# EAGLE board 7cell_1b (EAGLE 4.16)
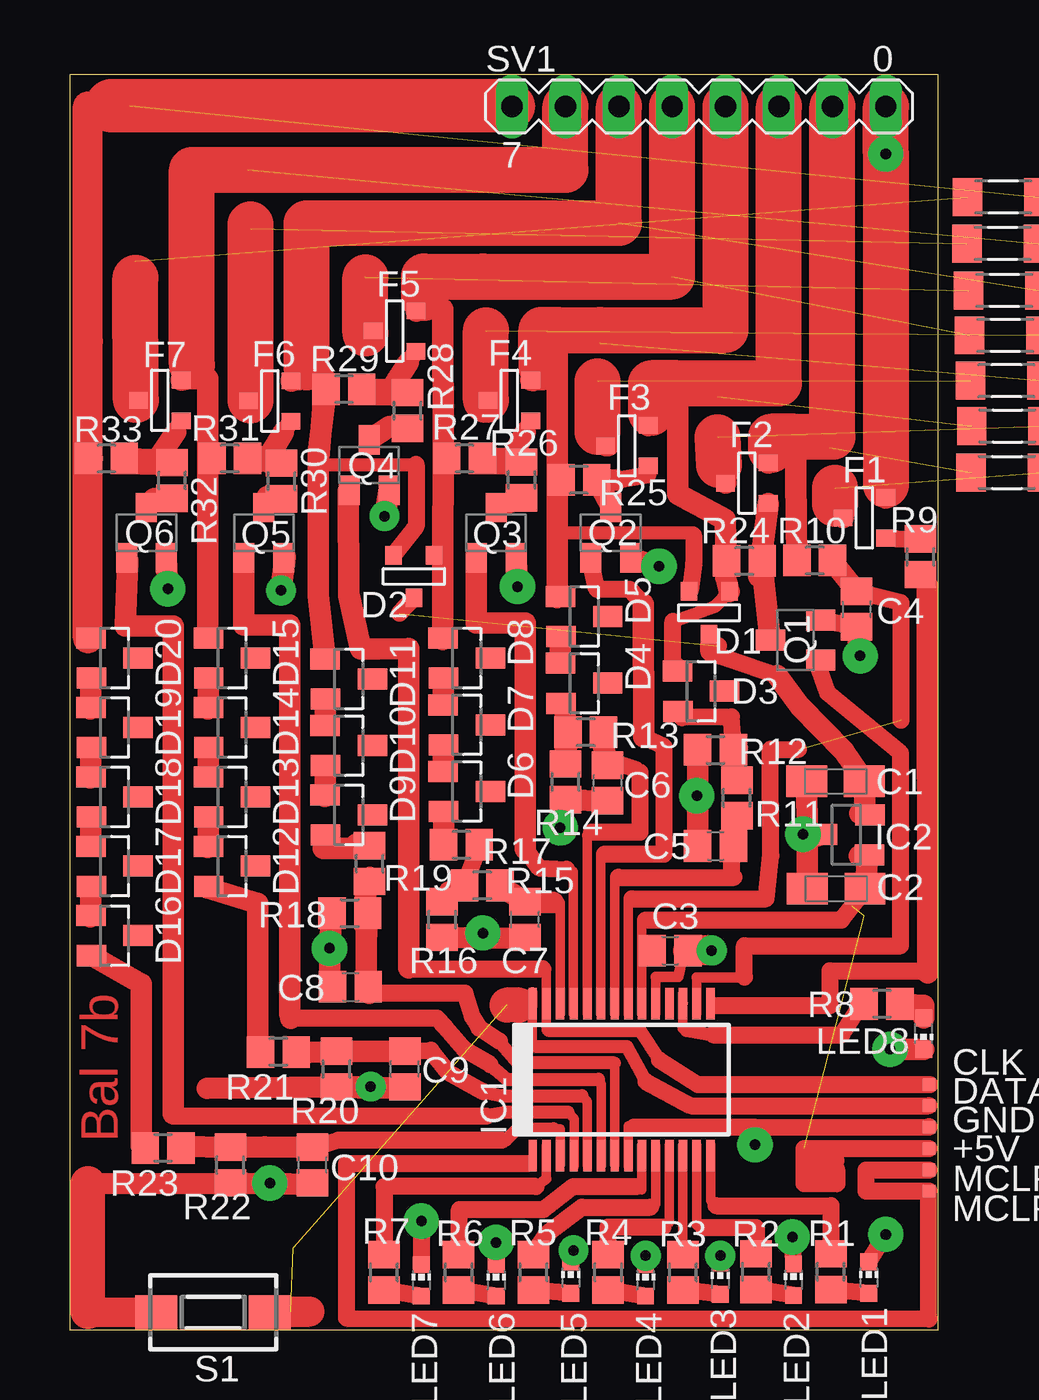
[diagram p0: board, top side]
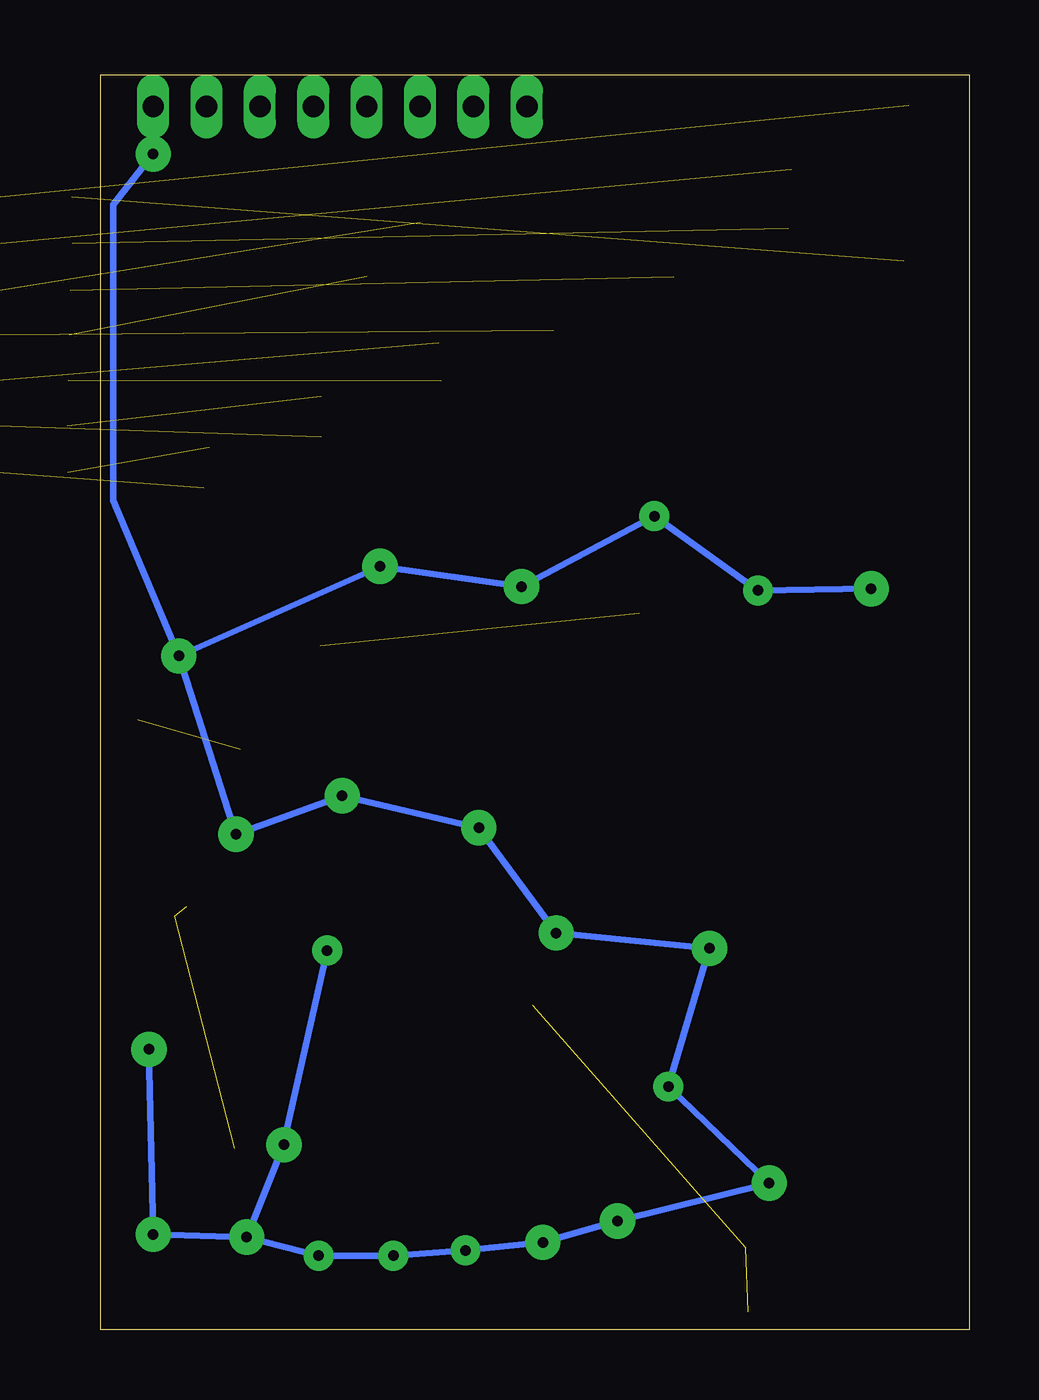
[diagram p1: board, bottom side, seen from below]

Size 41.33 x 59.76 mm. Coordinates in mm from the lower left corner, seen from the top.
Outline: 0,0 41.33,0 41.33,59.76 0,59.76 0,0
Copper layers (1*16): Top 0.035mm / dielectric 1.5mm / Bottom 0.035mm
Design rules "default": minimum track width 10mil, minimum drill 24mil, track to track 8mil, track to pad 8mil, pad to pad 8mil, via to via 8mil, smd to smd 8mil, copper to edge 40mil, drill to drill 8mil, minimum pad ring 10mil, minimum via ring 8mil, stop-mask expansion 4mil, vias tented up to drill 0mil, thermal gap 10mil

## Footprints (pad centres in the part's own frame; a part is rotated, then mirrored left to right if it is on the bottom)
TP06SQ = smd 0.6 x 0.6: TP 0,0
A/3216-18R = smd 1.95 x 1.5: + 1.375,0; - -1.375,0
C0805 = smd 1.3 x 1.5: 1 -0.85,0; 2 0.85,0
SOT-23 = smd 0.787 x 0.889: 1 0.025,-1.016; 2 -0.94,1.016; 3 0.991,1.016
SOT23 = smd 1 x 1.4: 1 0.955,-1.1; 2 -0.003,1.123; 3 -0.953,-1.123
SSOP28 = smd 0.4 x 1.5: 1 -4.225,-3.625; 2 -3.575,-3.625; 3 -2.925,-3.625; 4 -2.275,-3.625; 5 -1.625,-3.625; 6 -0.975,-3.625; 7 -0.325,-3.625; 8 0.325,-3.625; 9 0.975,-3.625; 10 1.625,-3.625; 11 2.275,-3.625; 12 2.925,-3.625; 13 3.575,-3.625; 14 4.225,-3.625; 15 4.225,3.625; 16 3.575,3.625; 17 2.925,3.625; 18 2.275,3.625; 19 1.625,3.625; 20 0.975,3.625; 21 0.325,3.625; 22 -0.325,3.625; 23 -0.975,3.625; 24 -1.625,3.625; 25 -2.275,3.625; 26 -2.925,3.625; 27 -3.575,3.625; 28 -4.225,3.625
SOT23' = smd 1 x 1.4: 1 0.003,1.123; 2 -0.955,-1.1; 3 0.953,-1.123
CHIP-LED0603 = smd 0.8 x 0.8: A 0,-0.75; C 0,0.75
SC59-BEC = smd 1 x 1.4: B -0.95,-1.2; C 0,1.2; E 0.95,-1.2
R0805 = smd 1.3 x 1.5: 1 -0.85,0; 2 0.85,0
M3516 = smd 1.4 x 1.8: 1 -1.7,0; 2 1.7,0
DTSM-3 = smd 2 x 1.6: 1 -2.7,0; 2 2.7,0
MA08-1 = drill 1.016 long: 1 -8.89,0; 2 -6.35,0; 3 -3.81,0; 4 -1.27,0; 5 1.27,0; 6 3.81,0; 7 6.35,0; 8 8.89,0

## Placement (x,y rotation side)
+5V  TPSTP06SQ  [TP06SQ]  40.88,8.63 0 top
C1  1u tant  [A/3216-18R]  36.44,26.11 0 top
C2  1u tant  [A/3216-18R]  36.46,21 0 top
C3  0.1  [C0805]  28.56,18.05 0 top
C4  0.1  [C0805]  37.43,34.31 270 top
C5  0.1  [C0805]  30.72,23.03 0 top
C6  0.1  [C0805]  25.59,26.03 90 top
C7  0.1  [C0805]  21.65,19.53 90 top
C8  0.1  [C0805]  13.35,16.33 0 top
C9  0.1  [C0805]  15.94,12.42 90 top
C10  0.1  [C0805]  11.54,7.84 90 top
CLK  TPSTP06SQ  [TP06SQ]  40.88,11.68 0 top
D1  1PS70SB15  [SOT-23]  30.39,34.13 0 top
D2  1PS70SB15  [SOT-23]  16.34,35.86 0 top
D3  5v ref diode  [SOT23]  30.04,30.4 270 top
D4  [SOT23]  24.47,30.78 270 top
D5  2x4.1v ref diodes  [SOT23]  24.47,33.95 270 top
D6  2.5, 4.1 & 5v ref diodes  [SOT23]  18.88,25.62 270 top
D7  [SOT23]  18.88,28.8 270 top
D8  [SOT23]  18.88,31.97 270 top
D9  3x5v ref diodes  [SOT23]  13.27,24.51 270 top
D10  [SOT23]  13.27,27.81 270 top
D11  [SOT23]  13.27,30.98 270 top
D12  1x3.3 & 3x5v ref diodes  [SOT23]  7.71,22.07 270 top
D13  [SOT23]  7.71,25.37 270 top
D14  [SOT23]  7.71,28.67 270 top
D15  [SOT23]  7.71,31.97 270 top
D16  1x2.5, 1x3.3, 3x5v ref diodes  [SOT23]  2.12,18.77 270 top
D17  [SOT23]  2.12,22.07 270 top
D18  [SOT23]  2.12,25.37 270 top
D19  [SOT23]  2.12,28.67 270 top
D20  [SOT23]  2.12,31.97 270 top
DATA  TPSTP06SQ  [TP06SQ]  40.88,10.66 0 top
F1  PMV31XN  [SOT-23]  37.81,38.68 270 top
F2  PMV31XN  [SOT-23]  32.22,40.33 270 top
F3  PMV31XN  [SOT-23]  26.5,42.11 270 top
F4  PMV31XN  [SOT-23]  20.92,44.27 270 top
F5  PMV31XN  [SOT-23]  15.46,47.57 270 top
F6  PMV31XN  [SOT-23]  9.51,44.24 270 top
F7  PMV31XN  [SOT-23]  4.28,44.27 270 top
GND  TPSTP06SQ  [TP06SQ]  40.88,9.65 0 top
IC1  PIC16F886  [SSOP28]  26.25,11.91 0 top
IC2  XC6202  [SOT23']  36.94,23.57 90 top
LED1  [CHIP-LED0603]  38.01,2.48 0 top
LED2  [CHIP-LED0603]  34.43,2.38 0 top
LED3  [CHIP-LED0603]  30.95,2.43 0 top
LED4  [CHIP-LED0603]  27.39,2.36 0 top
LED5  [CHIP-LED0603]  23.84,2.48 0 top
LED6  [CHIP-LED0603]  20.28,2.36 0 top
LED7  [CHIP-LED0603]  16.73,2.36 0 top
LED8  [CHIP-LED0603]  40.63,14.09 180 top
MCLR  TPSTP06SQ  [TP06SQ]  40.88,6.6 0 top
MCLR*  TPSTP06SQ  [TP06SQ]  40.88,7.62 0 top
Q1  MMUN2215  [SC59-BEC]  34.53,32.84 90 top
Q2  MMUN2215  [SC59-BEC]  25.74,37.94 0 top
Q3  MMUN2215  [SC59-BEC]  20.28,37.94 0 top
Q4  MMUN2215  [SC59-BEC]  14.24,41.17 0 top
Q5  MMUN2215  [SC59-BEC]  9.23,37.94 0 top
Q6  MMUN2215  [SC59-BEC]  3.64,37.94 0 top
R1  1k  [R0805]  36.21,2.76 90 top
R2  1k  [R0805]  32.65,2.76 90 top
R3  1k  [R0805]  29.17,2.74 90 top
R4  1k  [R0805]  25.62,2.74 90 top
R5  1k  [R0805]  22.06,2.74 90 top
R6  1k  [R0805]  18.5,2.74 90 top
R7  1k  [R0805]  14.95,2.74 90 top
R8  1k  [R0805]  38.65,15.51 180 top
R9  10k  [R0805]  40.48,36.8 90 top
R10  4k7  [R0805]  35.45,36.62 180 top
R11  1k  [R0805]  31.74,25.32 90 top
R12  4k7  [R0805]  30.72,27.6 0 top
R13  1k  [R0805]  24.55,28.44 180 top
R14  4k7  [R0805]  23.58,26.08 90 top
R15  1k  [R0805]  19.62,21.15 180 top
R16  4k7  [R0805]  17.72,19.53 90 top
R17  470  [R0805]  18.63,23.08 180 top
R18  3k9  [R0805]  13.32,19.83 0 top
R19  1k  [R0805]  14.26,22.19 90 top
R20  3k3  [R0805]  12.69,12.42 90 top
R21  1k5  [R0805]  9.92,13.23 180 top
R22  2k7  [R0805]  7.63,7.84 90 top
R23  2k2  [R0805]  4.43,8.66 180 top
R24  10k  [R0805]  32.09,36.6 180 top
R25  10k  [R0805]  24.22,40.46 180 top
R26  5k6  [R0805]  21.5,40.46 90 top
R27  4k7  [R0805]  18.78,41.47 180 top
R28  5k6  [R0805]  16.07,43.76 90 top
R29  4k7  [R0805]  13.04,44.78 180 top
R30  5k6  [R0805]  10.07,40.41 90 top
R31  4k7  [R0805]  7.61,41.47 180 top
R32  5k6  [R0805]  4.86,40.43 90 top
R33  4k7  [R0805]  1.74,41.47 180 top
R34  8.2R 3W  [M3516]  44.59,40.81 180 top
R35  8.2R 3W  [M3516]  44.62,43.02 180 top
R36  8.2R 3W  [M3516]  44.56,45.18 0 top
R37  8.2R 3W  [M3516]  44.51,47.34 180 top
R38  8.2R 3W  [M3516]  44.46,49.47 0 top
R39  8.2R 3W  [M3516]  44.39,51.71 0 top
R40  8.2R 3W  [M3516]  44.41,53.92 0 top
S1  [DTSM-3]  6.82,0.83 180 top
SV1  [MA08-1]  29.93,58.24 0 top

## Library data of the parts
+5V CLK DATA GND MCLR MCLR* = testpad
C1-C10 R1-R40 = rcl
D1 D2 F1-F7 = zetex
D3-D20 = diode
IC1 = microchip
IC2 = v-reg
LED1-LED8 = led
Q1-Q6 = transistor
S1 = switch-tact
SV1 = con-lstb

## Nets
C6: C1.- C2.- C3.2 C4.2 C5.1 C6.1 C7.1 C8.1 C9.1 C10.1 F1.2 GND.TP IC1.8 IC1.19 IC2.1 LED1.C LED2.C LED3.C LED4.C LED5.C LED6.C LED7.C LED8.C Q1.E Q2.E Q3.E Q4.E Q5.E Q6.E R12.1 R14.1 R16.1 R18.1 R20.1 R22.1 S1.2 SV1.8
D7B: D17.3 D18.1
N$1: LED4.A R4.1
N$2: F1.1 R34.1
N$3: D3.1 R11.2 R12.2
N$4: LED8.A R8.1
N$5: D2.3 D8.3 F5.2 R27.2 R37.2 SV1.4
N$6: F2.3 Q1.C R24.1
N$7: F3.3 Q2.C R25.1
N$8: LED1.A R1.1
N$9: F4.1 R37.1
N$10: LED2.A R2.1
N$11: IC1.17 R8.2
N$12: F3.1 R36.1
N$13: C4.1 IC1.21 R10.1
N$14: D4.1 R13.2 R14.2
N$15: IC1.12 R3.2
N$17: C1.+ D1.1 D2.1 IC2.3
N$18: D1.3 D3.3 F3.2 R24.2 R35.2 SV1.6
N$19: LED5.A R5.1
N$20: D7.3 D8.1
N$21: IC1.1 MCLR*.TP MCLR.TP
N$22: F2.1 R35.1
N$23: F2.2 R10.2 R34.2 SV1.7
N$24: LED3.A R3.1
N$25: D1.2 D5.3 F4.2 R25.2 R36.2 SV1.5
N$26: IC1.23 Q2.B
N$27: IC1.13 R2.2
N$28: IC1.14 R1.2
N$29: F1.3 R9.2
N$30: IC1.2 R7.2
N$31: IC1.15 R9.1
N$32: F4.3 R26.2 R27.1
N$33: D4.3 D5.1
N$34: D6.3 D7.1
N$35: C5.2 IC1.22 R11.1
N$36: Q3.C R26.1
N$37: Q4.C R28.1
N$38: F5.3 R28.2 R29.1
N$39: F5.1 R38.1
N$40: Q5.C R30.1
N$41: F6.3 R30.2 R31.1
N$42: F6.1 R39.1
N$43: F7.1 R40.1
N$44: Q6.C R32.1
N$45: F7.3 R32.2 R33.1
N$46: D2.2 D11.3 F6.2 R29.2 R38.2 SV1.3
N$47: D15.3 F7.2 R31.2 R39.2 SV1.2
N$48: D20.3 R33.2 R40.2 SV1.1
N$49: IC1.9 R6.2
N$50: CLK.TP IC1.27 Q4.B
N$51: IC1.6 Q5.B
N$52: IC1.4 Q6.B
N$53: C6.2 IC1.24 R13.1
N$54: D6.1 R17.2
N$55: C8.2 IC1.7 R18.2 R19.1
N$56: D10.3 D11.1
N$57: D9.3 D10.1
N$58: C9.2 IC1.5 R20.2 R21.1
N$59: C10.2 IC1.3 R22.2 R23.1
N$60: D14.3 D15.1
N$61: D13.3 D14.1
N$62: D12.3 D13.1
N$63: D12.1 R21.2
N$64: D9.1 R19.2
N$65: D19.3 D20.1
N$66: D18.3 D19.1
N$67: C7.2 IC1.26 R15.1
N$68: D16.3 D17.1
N$69: D16.1 R23.2
N$70: R15.2 R16.2 R17.1
N$71: LED6.A R6.1
N$72: LED7.A R7.1
N$76: IC1.16 Q1.B
N$80: IC1.10 R5.2
N$81: IC1.11 R4.2
N$82: DATA.TP IC1.28 S1.1
N$83: +5V.TP C2.+ C3.1 IC1.20 IC2.2
N$84: IC1.25 Q3.B

## Tracks (layer width: path | path; a pad name or v marks a point on that pad's centre or on a via)
C6  (via drill 0.5 pad 1.42, 0.5 pad 1.68)
  Top 0.305: C5.1 29.83,23.13 v29.83,25.42 | R16.1 17.74,18.64 v19.65,18.89
  Top 0.406: 26.58,7.79 IC1.8
  Top 0.457: 26.58,7.79 26.58,9.7 26.84,9.65 | IC1.19 27.88,15.03 27.88,16.81
  Top 0.508: 27.88,16.81 28.94,16.81 29.17,17.77 C3.2
  Top 0.61: 32.5,9.65 32.5,9.72
  Top 0.813: 26.84,9.65 32.5,9.65 32.55,9.65 | Q1.E 36.69,33.6 37.4,33.55 C4.2 | v16.73,5.18 LED7.C | v20.28,4.16 LED6.C | v23.96,3.78 LED5.C | v27.39,3.53 LED4.C | v30.95,3.53 LED3.C | v34.38,4.41 LED2.C | v38.82,4.54 LED1.C | 32.55,9.65 32.58,9.65 v32.6,8.81 32.55,9.65 | GND.TP 40.88,9.67 32.55,9.65
  Top 1.016: 11.57,6.93 C10.1 | 11.57,6.93 9.26,6.95 R22.1 9.23,6.95 v9.51,6.98 | C9.1 15.94,11.53 13.78,11.53 R20.1 6.54,11.5 v14.31,11.58 | C8.1 12.36,16.25 12.36,18.41 R18.1 v12.36,18.16 | 25.67,25.22 C6.1 R14.1 v23.33,23.9 | C5.1 R12.1 29.96,27.6 | IC2.1 35.34,23.57 35.09,23.57 C1.- | 35.09,23.44 35.34,23.44 IC2.1 | 35.09,23.44 C2.- | 35.09,23.44 35.19,23.44 | C7.1 21.55,18.64 R16.1 | 38.82,39.59 F1.2 38.82,40.23 | v4.66,35.28 Q6.E | Q5.E 10.25,36.8 v10.05,35.2 | v14.97,38.73 Q4.E | v21.3,35.38 Q3.E | v28.03,36.34 Q2.E | C4.2 37.43,33.5 v37.6,32.08 | IC2.1 35.9,23.59 v34.89,23.59 | 0.85,6.95 v9.51,6.98 | v9.51,6.98 11.57,6.93 | v39.03,13.36 LED8.C
  Top 1.422: 0.85,0.86 S1.2 | v30.54,18.05 C3.2
  Top 1.676: 0.85,0.86 0.85,6.95
  Top 2.184: 38.82,40.23 v38.82,55.98 SV1.8
  Bottom 0.305: v4.66,35.28 v10.05,35.2 v14.97,38.73 v21.3,35.38 v28.03,36.34 v37.6,32.08 | v37.6,32.08 40.73,39.47 40.73,53.56 v38.82,55.98 | v37.6,32.08 v34.89,23.59 v29.83,25.42 v23.33,23.9 v19.65,18.89 v12.36,18.16 v14.31,11.58 v9.51,6.98 v16.73,5.18 v20.28,4.16 v23.96,3.78 v27.39,3.53 v30.95,3.53 v34.38,4.41 | v34.38,4.41 v38.82,4.54 38.82,4.57 v39.03,13.36 | v34.38,4.41 v32.6,8.81 32.63,8.81 v30.54,18.05
D7B
  Top 1.016: D17.3 0.98,23.08 D18.1
N$1
  Top 0.813: R4.1 25.64,1.87 LED4.A
N$2  (1 unrouted)
  Top 1.016: F1.1 36.66,38.91 36.41,39.31
  Top 2.184: 36.41,39.31 36.41,40.08
N$3
  Top 0.813: D3.1 29.12,29.14 31.48,29.18 31.59,27.73
  Top 1.016: R12.2 31.61,27.6 31.76,27.71 | 31.61,26.21 31.74,26.21 | R11.2 31.61,26.21 | R12.2 31.57,26.21 31.61,26.21 | R12.2 31.59,27.73
N$4
  Top 1.016: LED8.A 40.63,15.44 R8.1
N$5  (1 unrouted)
  Top 0.305: 16.85,49.12 16.98,49.75 19.65,50.13 19.52,49.5
  Top 0.61: 17.77,36.88 17.75,36.88 D2.3
  Top 1.016: 17.77,41.6 R27.2 | 17.77,41.6 17.74,48.59 16.98,48.97 F5.2 | 17.74,32.93 17.74,32.86 | D8.3 17.74,32.93 | 17.74,32.93 17.75,36.88 17.77,41.6 | F5.2 16.47,48.48 | F5.2 16.85,49.12
  Top 2.184: SV1.4 28.66,50.13 19.65,50.13 16.85,50.13 16.85,49.12
N$6
  Top 1.016: F2.3 32.78,35.86 R24.1 33.01,35.63 Q1.C
N$7
  Top 0.813: F3.3 27.52,40.71 26,40.46
  Top 1.016: 26,40.46 R25.1 25.74,39.21 Q2.C
N$8
  Top 0.813: R1.1 36.23,1.9 LED1.A
N$9  (1 unrouted)
  Top 1.016: F4.1 20.28,44.24 19.8,44.27
  Top 2.184: 19.8,44.27 19.8,47.57
N$10
  Top 0.813: R2.1 32.65,1.93 LED2.A
N$11
  Top 0.457: IC1.17 | IC1.17 29.17,16.02 | IC1.17 29.17,14.35
  Top 0.508: 29.17,14.35 29.35,14.24
  Top 0.61: 29.35,14.24 30.59,14.04
  Top 0.813: 30.59,14.04 36.74,14.04 37.71,15.57 R8.2
N$12  (1 unrouted)
  Top 1.016: F3.1 25.62,42.08 25.11,42.74
  Top 2.184: 25.11,42.74 25.11,45.16
N$13  (1 unrouted)
  Top 0.457: 26.58,15.01 IC1.21 26.58,20.39 26.76,20.52
  Top 0.813: 26.76,20.52 33.13,20.52 33.36,22.58 33.34,27.63 34.68,27.63 | 39.56,29.03 39.56,34.62 37.38,35.17 C4.1
  Top 1.016: R10.1 36.34,36.55 C4.1
N$14
  Top 1.016: D4.1 23.58,29.82 23.58,26.97 | R14.2 23.58,26.97 | 23.58,26.97 R13.2
N$15
  Top 0.406: IC1.12
  Top 0.457: 29.17,8.81 IC1.12 R3.2
  Top 0.508: R3.2
N$17  (1 unrouted)
  Top 0.813: 30.41,32.24 D1.1 | 30.41,32.24 31.31,31.95 33.67,31.14 | 36.84,27.53 36.87,27.48 | D2.1 15.69,34.11 | 30.87,32.56 30.41,32.24
  Top 1.016: IC2.3 37.58,24.58 37.84,24.58 C1.+ 37.81,26.13 36.87,27.48 | 33.67,31.14 34.73,29.69 36.84,27.53
N$18  (1 unrouted)
  Top 0.305: 30.7,34.44 31.08,34.84 31.33,38.45 29.05,39.59 28.92,44.29 27.77,44.42 30.82,44.93 30.82,44.42
  Top 0.61: D1.3 30.7,34.44 28.69,33.73
  Top 0.813: 28.69,33.73 28.69,31.52 28.74,31.52
  Top 1.016: 28.79,31.55 D3.3 28.74,31.52 | 27.65,43.66 F3.2 | D1.3 31.2,35.81 R24.2 31.18,38.58 28.92,39.77 28.92,45.05
  Top 2.184: SV1.6 33.74,45.05 28.92,45.05 27.65,45.05 27.65,43.66
N$19
  Top 0.813: R5.1 22.11,1.87 LED5.A
N$20
  Top 1.016: D7.3 17.74,29.81 D8.1
N$21
  Top 0.305: 21.83,8.1 21.81,7.92 IC1.1
  Top 0.813: 40.88,0.53 13.17,0.55 13.17,7.92 21.81,7.92 | 40.88,0.53 40.8,0.53 | 40.88,0.53 40.88,0.5 | 40.88,0.53 MCLR.TP 37.88,6.6 37.88,7.61 MCLR*.TP
N$22  (1 unrouted)
  Top 1.016: F2.1 31.15,40.84 30.9,41.17
  Top 2.184: 30.9,41.17 30.82,42.49
N$23  (1 unrouted)
  Top 0.305: F2.2 36.16,42.77 36.16,42.01
  Top 1.016: F2.2 33.24,41.37 33.36,41.88 | R10.2 34.51,42.51
  Top 2.184: SV1.7 36.28,42.51 34.51,42.51 33.36,42.51 33.36,41.88
N$24
  Top 0.813: R3.1 29.17,1.9 LED3.A
N$25  (1 unrouted)
  Top 0.305: 23.2,34.86 23.2,45.56 22.44,46.71 25.23,47.59 25.23,46.96
  Top 0.61: 23.2,37.97 23.18,38.12 | 23.2,37.94 29.68,37.94 29.68,37.82
  Top 0.813: D1.2 29.53,35.22 29.68,36.47 29.68,37.82
  Top 1.016: D5.3 23.2,34.86 23.2,37.94 23.2,37.97 23.2,40.46 | 23.2,40.46 R25.2 | 22.06,45.18 F4.2 22.44,45.82 | 23.2,40.46 23.2,45.56 23.2,47.59
  Top 2.184: SV1.5 31.2,47.59 25.23,47.59 23.2,47.59 22.44,47.59 22.44,46.71 22.44,45.82
N$26
  Top 0.406: IC1.23 25.26,15.01
  Top 0.457: 25.26,15.01 25.26,22.6 25.44,22.65
  Top 0.813: 25.44,22.65 28.28,22.65 28.28,27.76 27.32,28.21 | 27.29,34.54 26.63,35.25 25.08,35.25 24.73,36.75 Q2.B
  Top 1.016: 27.32,28.21 27.29,34.54
N$27
  Top 0.406: IC1.13
  Top 0.457: 29.83,8.81 IC1.13 29.83,5
  Top 0.508: 29.83,5 30.16,4.87
  Top 0.813: 30.16,4.87 32.65,4.87 R2.2
N$28
  Top 0.305: IC1.14 30.49,8.3
  Top 0.457: 30.49,8.83 30.49,8.3 30.49,6.14 30.52,6.17
  Top 0.508: 30.52,6.17 30.75,5.91
  Top 0.813: 30.75,5.91 36.21,5.91 R1.2
N$29
  Top 0.813: R9.2 39.33,37.66 F1.3
N$30
  Top 0.406: IC1.2
  Top 0.457: 22.67,8.78 IC1.2 22.67,7.18
  Top 0.508: 22.67,7.18 22.19,6.83
  Top 0.61: R7.2 14.95,3.37
  Top 0.813: 22.19,6.83 14.95,6.83 R7.2
N$31
  Top 0.305: IC1.15 30.72,15.44
  Top 0.813: 40.8,35.43 40.75,35.5 R9.1 | 30.72,15.44 36.18,15.44 36.18,17.09 40.86,17.09 40.83,16.99
  Top 1.016: 40.83,16.99 40.8,35.43 40.8,33.94
N$32
  Top 0.813: 21.68,42.74 F4.3
  Top 1.016: R26.2 20.92,41.35 21.68,42.74 | 19.67,41.35 R27.1
  Top 1.27: 20.92,41.35 19.67,41.35
N$33
  Top 1.016: D5.1 23.33,33 23.33,31.73 D4.3
N$34
  Top 1.016: D6.3 17.74,26.77 D7.1
N$35
  Top 0.305: C5.2 31.48,22.88
  Top 0.457: 25.92,15.01 IC1.22 25.92,21.41 26.1,21.53
  Top 0.813: 31.48,22.88 31.48,21.58 31.61,21.53 26.1,21.53
  Top 1.016: C5.2 31.61,23.03 R11.1
N$36
  Top 1.016: Q3.C 20.28,39.09 R26.1
N$37
  Top 1.016: R28.1 15.2,43 Q4.C
N$38
  Top 0.813: 16.09,46.05 F5.3
  Top 1.016: R28.2 15.2,44.65 16.09,46.05 | 13.93,44.65 R29.1
  Top 1.27: 15.2,44.65 13.93,44.65
N$39  (1 unrouted)
  Top 0.813: 14.06,47.44 F5.1
  Top 2.184: 14.06,47.44 14.06,50.11
N$40
  Top 1.016: R30.1 9.38,39.67 Q5.C
N$41
  Top 0.813: 10.15,42.72 F6.3
  Top 1.016: R30.2 9.38,41.45 10.15,42.72
  Top 1.27: 9.38,41.45 R31.1
N$42  (1 unrouted)
  Top 0.813: F6.1 8.6,44.24
  Top 2.184: 8.6,44.24 8.6,52.42 8.6,52.62
N$43  (1 unrouted)
  Top 0.305: 3.11,50.08 3.11,50.87
  Top 1.016: F7.1 2.63,44.5 3.14,44.27
  Top 2.184: 3.14,44.27 3.11,50.08
N$44
  Top 1.016: R32.1 4.03,39.57 Q6.C
N$45
  Top 0.813: 5.04,42.74 F7.3
  Top 1.016: R32.2 4.03,41.22 5.04,42.74 | 2.63,41.35 R33.1
  Top 1.27: R32.2 2.63,41.35
N$46  (1 unrouted)
  Top 0.305: 11.26,52.67 14.19,52.55 14.06,51.91
  Top 0.61: 11.75,41.7 11.82,41.19 16.47,41.19
  Top 0.813: D2.2 16.47,38.25 16.47,41.19
  Top 1.016: F6.2 11.39,45.28 12.15,45.28 11.82,41.19 | R29.2 11.82,41.75 11.82,41.19 | D11.3 11.82,34.96 11.82,41.19 | F6.2 10.53,45.16 | F6.2 11.26,45.82
  Top 2.184: SV1.3 26.12,52.7 11.26,52.67 11.26,45.82
N$47  (1 unrouted)
  Top 1.016: 6.57,41.47 R31.2 | 6.57,41.47 6.57,45.28 5.68,45.28 F7.2 5.8,45.94 | D15.3 6.57,32.93 6.57,41.47
  Top 2.184: SV1.2 23.58,55.21 8.47,55.21 5.8,55.21 5.8,45.94
N$48  (1 unrouted)
  Top 0.305: 0.85,58.24 2.88,58.26
  Top 1.016: 0.85,47.06 0.85,47.19 | 0.85,41.47 R33.2 | D20.3 0.85,32.93 | 0.85,58.24 1.99,58.26
  Top 1.422: 0.85,32.93 0.85,41.47 0.85,47.06 0.85,58.24
  Top 2.184: SV1.1 21.04,58.26 20.66,58.26
  Top 2.54: 1.99,58.26 2.88,58.26 20.66,58.26
N$49
  Top 0.406: 27.22,8.29 IC1.9
  Top 0.457: 27.22,8.81 27.22,8.29 27.22,6.68 26.96,6.83
  Top 0.813: R6.2 18.53,3.63 18.53,5.74 22.54,5.74 23.96,6.83 26.96,6.83
N$50
  Top 0.406: IC1.27
  Top 0.457: 22.67,17.19 IC1.27 22.67,14.24 22.8,14.24
  Top 0.508: 22.49,17.19 22.67,17.19
  Top 0.61: 28.05,12.85 27.11,14.24 22.8,14.24
  Top 0.813: 22.49,17.19 16.27,17.19 16.04,17.24 16.24,17.29 16.12,17.22 | 28.05,12.85 29.88,11.68 CLK.TP 40.93,11.68
  Top 1.016: 16.12,17.22 16.12,32.43 13.83,32.41 | 13.83,32.41 14.64,32.41 | 13.27,39.54 Q4.B 13.25,39.92 13.27,35 13.83,32.41
N$51
  Top 0.406: 25.29,7.79 IC1.6
  Top 0.457: 25.29,7.79 25.29,11.7 25.16,11.93
  Top 0.61: 25.16,11.93 20.79,11.93 20.23,12.39 20,12.63
  Top 0.813: 20,12.62 20,12.63 18.78,13.33 17.89,14.37 17.46,14.83 10.5,14.83
  Top 1.016: 10.5,14.83 10.45,15.03 10.45,33.55 8.27,33.55 8.27,36.74 Q5.B
N$52
  Top 0.406: 23.99,7.79 IC1.4
  Top 0.457: 23.99,7.79 23.99,10.05 23.71,10.36
  Top 0.61: 23.71,10.36 20.77,10.36 19.83,10.18
  Top 0.813: 4.92,10.28 4.97,11.02 4.99,10.18 19.83,10.18
  Top 1.016: Q6.B 2.76,36.62 2.63,33.5 4.92,33.5 4.92,10.28
N$53
  Top 0.305: 27.14,26.54 26.94,26.66
  Top 0.457: IC1.24 | 24.62,15.03 IC1.24 | IC1.24 24.62,23.54
  Top 0.508: 25.62,27.1 25.62,26.88 C6.2 | 24.62,23.54 24.83,23.69
  Top 0.813: 26.94,26.66 25.62,27.1 | 27.14,26.54 27.14,23.69 24.83,23.69
  Top 1.016: C6.2 25.49,27.34 25.34,27.93 R13.1
N$54
  Top 1.016: 17.78,22.96 R17.2 | D6.1 17.78,22.96 | 17.78,22.96 17.87,22.96
N$55
  Top 0.457: IC1.7 25.92,7.82 25.92,12.69
  Top 0.61: 20.43,13.74 21.32,12.69 25.92,12.69
  Top 0.813: 20.43,13.74 19.47,14.37 19.16,14.88 18.81,16.02 14.24,16.02
  Top 1.016: 14.11,18.49 14.11,16.33 C8.2 14.24,16.02 | 14.26,21.53 R19.1 14.06,20.62 14.11,18.49 | R18.2 14.11,18.49
N$56
  Top 1.016: D10.3 12.13,28.82 D11.1
N$57
  Top 1.016: D9.3 12.13,25.39 D10.1
N$58
  Top 0.457: IC1.5 | IC1.5 24.62,7.82 | IC1.5 24.62,10.87 24.37,11.15
  Top 0.61: 24.37,11.15 20.59,11.15 19.75,11.3 19.64,11.35
  Top 0.813: 19.65,11.35 19.64,11.35 17.97,12.29 17.18,13.3 C9.2 15.89,13.25
  Top 1.016: C9.2 13.91,13.25 R20.2 10.83,13.18 R21.1
N$59
  Top 0.457: IC1.3 23.33,7.82 23.33,9.57 23.02,9.57
  Top 0.61: 23.02,9.57 21.3,9.57 20.77,9.04 20.56,9.04
  Top 0.813: 11.44,8.66 C10.2 11.65,8.68 12.79,9.04 20.56,9.04
  Top 1.016: C10.2 9.28,8.71 R22.2 5.22,8.73 R23.1
N$60
  Top 1.016: D14.3 6.57,29.56 D15.1
N$61
  Top 1.016: D13.3 6.57,26.39 D14.1
N$62
  Top 1.016: D12.3 6.57,22.96 D13.1
N$63
  Top 1.016: R21.2 8.93,13.18 8.93,20.29 6.54,21.03 D12.1
N$64
  Top 1.016: D9.1 12.26,23.55 12.05,22.91 13.45,22.91 13.65,23.12 R19.2
N$65
  Top 1.016: D19.3 0.98,29.56 D20.1
N$66
  Top 1.016: D18.3 0.98,26.26 D19.1
N$67
  Top 0.457: IC1.26 23.33,15.01 23.33,15.06 23.33,20.34 | 23.3,20.37 23.33,20.34 | 23.33,20.34 23,20.34
  Top 1.016: R15.1 20.41,21.18 C7.2 21.65,20.34 23,20.34
N$68
  Top 1.016: D16.3 0.98,19.65 D17.1
N$69
  Top 1.016: D16.1 3.39,16.45 3.39,8.76 3.72,8.68 R23.2
N$70
  Top 0.813: R15.2 19.09,21.99 R17.1
  Top 1.016: R16.2 18.05,20.85 R15.2
N$71
  Top 0.813: R6.1 18.48,1.9 LED6.A
N$72
  Top 0.813: R7.1 14.97,1.87 LED7.A
N$76
  Top 0.406: IC1.16 29.83,15.03
  Top 0.457: 29.83,15.03 29.83,16.78
  Top 0.508: 29.83,16.78 32.09,16.78
  Top 0.813: Q1.B 35.55,31.8 36.05,30.32 39.53,27.45 39.53,18.28 32.09,18.28 32.09,16.78 32.07,16.91
N$80
  Top 0.457: IC1.10 | IC1.10 27.88,8.78 | IC1.10 27.88,5.96 27.62,5.84
  Top 0.813: 27.62,5.84 24.37,5.84 22.64,4.52 22.06,3.65 R5.2
N$81
  Top 0.305: 28.51,8.3 IC1.11
  Top 0.457: 28.51,8.81 28.51,8.3 28.51,5.1 28.23,4.9
  Top 0.813: R4.2 25.62,4.9 28.23,4.9
N$82  (2 unrouted)
  Top 0.305: 22.01,13.48 22.06,15.21 20.79,15.46
  Top 0.457: 22.01,16.07 IC1.28 | 22.19,13.48 22.01,13.48 22.01,15.41
  Top 0.508: 22.01,16.07 22.01,15.41 21.81,15.41
  Top 0.61: 27.42,11.81 26.5,13.48 22.19,13.48
  Top 0.813: 27.42,11.81 29.55,10.66 DATA.TP | 21.81,15.41 21.37,15.46
  Top 1.422: S1.1 11.39,0.86 10.5,0.86
  Top 1.676: 21.37,15.46 20.79,15.46
N$83  (2 unrouted)
  Top 0.406: 27.22,15.01 IC1.20
  Top 0.457: 27.22,15.01 27.22,18.05 | 27.22,18.05 27.22,19.5 27.39,19.5 | 27.22,18.05 C3.1
  Top 0.813: 27.39,19.5 36.72,19.5 37.83,20.95 C2.+ | +5V.TP 34.94,8.63 34.94,6.95 36.49,6.95 | 36.49,6.95 36.51,6.95 | 36.49,6.95 36.49,7.64 35.32,7.64 35.32,8.05 36.46,8.05
  Top 1.016: IC2.2 37.56,22.55 37.96,22.55 C2.+
N$84
  Top 0.406: 23.96,15.53 IC1.25
  Top 0.457: 23.63,21.92 23.96,21.81 23.96,15.53 23.96,15.03
  Top 0.813: 21.68,22.88 22.31,21.99 23.63,21.92
  Top 1.016: Q3.B 19.34,33.65 21.68,33.65 21.68,22.88

## Text on the board
Top: Bal 7b
bOrigins: _ | +